# EAGLE board MagController (EAGLE 7.1.0)
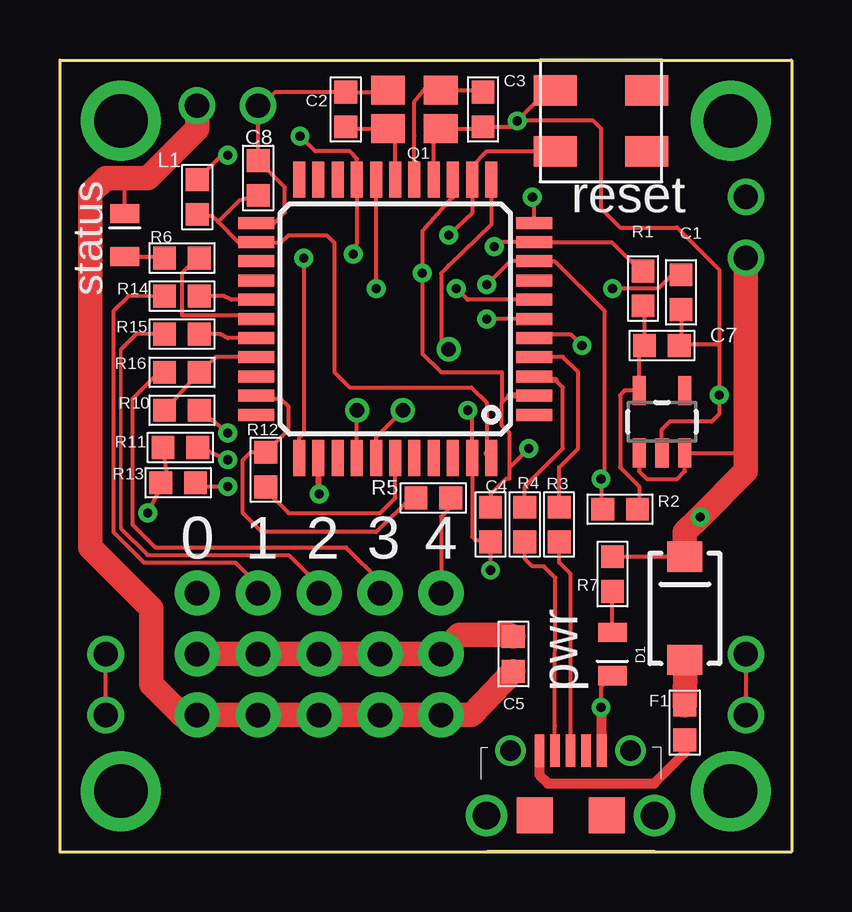
[diagram p0: board, top side]
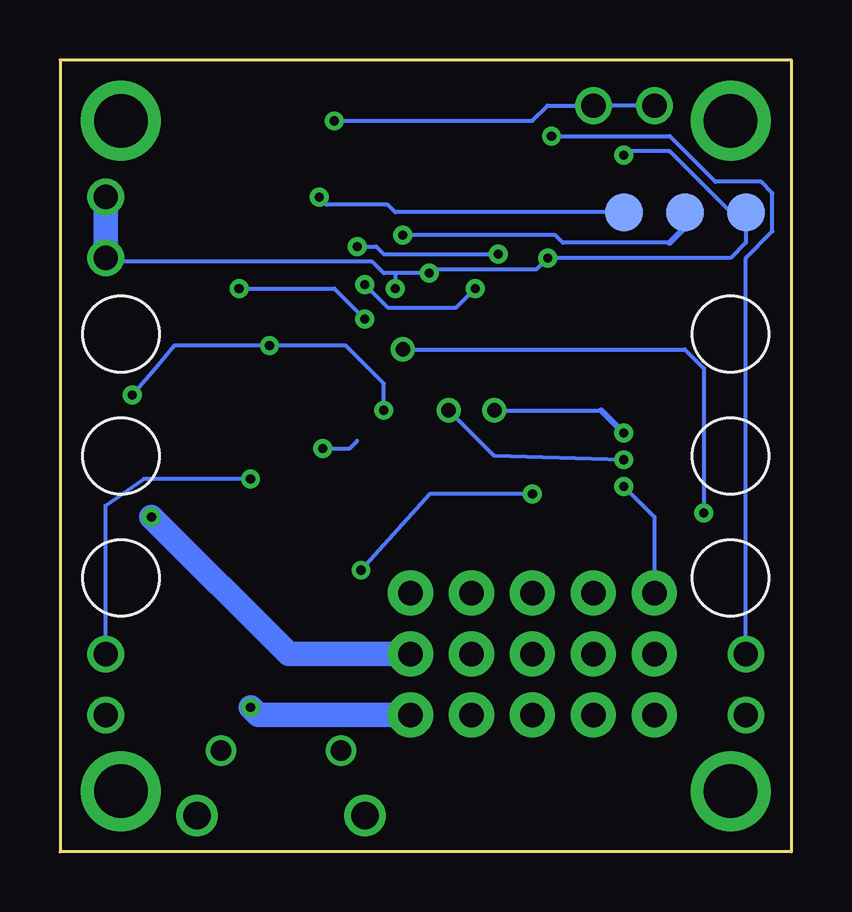
[diagram p1: board, bottom side, seen from below]

Size 30.48 x 33.02 mm. Coordinates in mm from the lower left corner, seen from the top.
Copper layers (1*16): Top 0.0178mm / dielectric 59mil / Bottom 0.0178mm
Design rules "SSC-EAGLE-2Lyr_v1.0.0.3": minimum track width 6mil, minimum drill 14mil, track to track 6mil, track to pad 6mil, pad to pad 6mil, via to via 6mil, smd to smd 6mil, copper to edge 20mil, drill to drill 16mil, minimum pad ring 8mil, minimum via ring 8mil, stop-mask expansion 3mil, vias tented up to drill 0mil, thermal gap 10mil

## Footprints (pad centres in the part's own frame; a part is rotated, then mirrored left to right if it is on the bottom)
0603 = smd 0.95 x 0.95: 1 -0.725,0; 2 0.725,0
SMA-DIODE = smd 1.27 x 1.47: A -2.15,0; C 2.15,0
1X05_NO_SILK = drill 1.016 pad 1.88: 1 0,0; 2 2.54,0; 3 5.08,0; 4 7.62,0; 5 10.16,0
0805-LED = smd 1.2 x 0.8: A 0,-0.9; C 0,0.9
MAGDEVICE = drill 1.016: GNDA 5.715,31.115; GNDB 8.255,31.115; SCLA 28.575,5.715; SCLB 28.575,8.255; SDAA 1.905,5.715; SDAB 1.905,8.255; VCCA 28.575,27.305; VCCB 28.575,24.765 | drill 2.223: H1 2.54,30.48; H2 2.54,2.54; H3 27.94,30.48; H4 27.94,2.54 | smd 1.587 x 1.587 bottom: MISO 6.985,26.67; RESET 4.445,26.67; VPROG 1.905,26.67
NX3225 = smd 1.4 x 1.2: 1 -1.1,-0.8; 2 1.1,-0.8; 3 1.1,0.8; 4 -1.1,0.8
BOURNS-7914J = smd 1.27 x 1.778: NEG$1 1.27,1.905; NEG$2 1.27,-1.905; POS$1 -1.27,1.905; POS$2 -1.27,-1.905
SPARKFUN-DIGITALIC_TQFP44 = smd 1.5 x 0.5: 1 -5.8,4; 2 -5.8,3.2; 3 -5.8,2.4; 4 -5.8,1.6; 5 -5.8,0.8; 6 -5.8,0; 7 -5.8,-0.8; 8 -5.8,-1.6; 9 -5.8,-2.4; 10 -5.8,-3.2; 11 -5.8,-4; 23 5.8,-4; 24 5.8,-3.2; 25 5.8,-2.4; 26 5.8,-1.6; 27 5.8,-0.8; 28 5.8,0; 29 5.8,0.8; 30 5.8,1.6; 31 5.8,2.4; 32 5.8,3.2; 33 5.8,4 | smd 0.5 x 1.5: 12 -4,-5.8; 13 -3.2,-5.8; 14 -2.4,-5.8; 15 -1.6,-5.8; 16 -0.8,-5.8; 17 0,-5.8; 18 0.8,-5.8; 19 1.6,-5.8; 20 2.4,-5.8; 21 3.2,-5.8; 22 4,-5.8; 34 4,5.8; 35 3.2,5.8; 36 2.4,5.8; 37 1.6,5.8; 38 0.8,5.8; 39 0,5.8; 40 -0.8,5.8; 41 -1.6,5.8; 42 -2.4,5.8; 43 -3.2,5.8; 44 -4,5.8
SOT23-5 = smd 0.55 x 1.2: 1 -0.95,-1.3; 2 0,-1.3; 3 0.95,-1.3; 4 0.95,1.3; 5 -0.95,1.3
USB-MICROB-FCI = smd 0.4 x 1.35: P1 -1.3,2.7; P2 -0.65,2.7; P3 0,2.7; P4 0.65,2.7; P5 1.3,2.7 | drill 0.85: S1 -2.5,2.7; S2 2.5,2.7 | drill 1.15: S3 -3.5,0; S6 3.5,0 | smd 1.5 x 1.5: S4 -1.5,0; S5 1.5,0

## Placement (x,y rotation side)
C1  1uF  [0603]  25.88,23.34 270 top
C2  18pF  [0603]  11.91,30.96 90 top
C3  18pF  [0603]  17.62,30.96 270 top
C4  100nF  [0603]  17.94,13.65 270 top
C5  10uF  [0603]  18.89,8.26 270 top
C7  100nF  [0603]  25.08,21.11 0 top
C8  100nF  [0603]  8.26,28.1 90 top
D1  [SMA-DIODE]  26.04,10.16 90 top
F1  2A  [0603]  26.04,5.4 90 top
JP4  [1X05_NO_SILK]  5.71,10.79 0 top
JP5  [1X05_NO_SILK]  15.88,5.71 180 top
JP6  [1X05_NO_SILK]  15.88,8.26 180 top
L1  10uH  [0603]  5.71,27.31 270 top
LED1  blue  [0805-LED]  2.7,25.72 0 top
LED2  green  [0805-LED]  23.02,8.26 180 top
PCB1  MAGDEVICE  [MAGDEVICE]  0,0 0 top
Q1  16Mhz  [NX3225]  14.76,30.96 0 top
R1  1.5KΩ  [0603]  24.29,23.5 90 top
R2  1.5KΩ  [0603]  23.34,14.29 180 top
R3  22Ω  [0603]  20.8,13.65 90 top
R4  22Ω  [0603]  19.37,13.65 90 top
R5  150Ω  [0603]  15.56,14.76 0 top
R6  681Ω  [0603]  5.08,24.77 180 top
R7  681Ω  [0603]  23.02,11.59 270 top
R10  1.5KΩ  [0603]  5.08,18.42 180 top
R11  1.5KΩ  [0603]  5.02,16.86 180 top
R12  1.5KΩ  [0603]  8.57,15.94 90 top
R13  150Ω  [0603]  4.92,15.4 0 top
R14  150Ω  [0603]  5.08,23.18 180 top
R15  150Ω  [0603]  5.08,21.59 180 top
R16  150Ω  [0603]  5.08,20 180 top
SW1  blue  [BOURNS-7914J]  22.54,30.48 90 top
U1  ATMEGA32U4TQFP  [SPARKFUN-DIGITALIC_TQFP44]  13.97,22.23 180 top
U2  3.3V/150mA  [SOT23-5]  25.08,17.94 0 top
U3  USBFCI-MICROB  [USB-MICROB-FCI]  21.27,1.52 0 top

## Library data of the parts
C1 = Modulo; PARTNUM: C0603C105K4RACTU
C2 C3 = Modulo; PARTNUM: C0603C180J5GACTU
C4 C7 C8 = Modulo; PARTNUM: C0603C104K5RACTU
C5 = Modulo; PARTNUM: GRM188R60J106ME47D
D1 = SparkFun-DiscreteSemi; PARTNUM: SSA33L-E3/61TGICT-ND
F1 = Modulo; PARTNUM: MF-PSMF110X-2
JP4-JP6 = SparkFun-Connectors
L1 = Modulo; PARTNUM: LQM18FN100M00
LED1 = Modulo; PARTNUM: LTST-C171TBKT
LED2 = Modulo; PARTNUM: LTST-C171GKT
PCB1 = Modulo
Q1 = Modulo; PARTNUM: CX3225GB16000P0HPQCC
R1 R2 R10-R12 = Modulo; PARTNUM: ERJ-3EKF1501V
R3 R4 = Modulo; PARTNUM: ERJ-3EKF22R0V
R5 R13-R16 = Modulo; PARTNUM: ERJ-3EKF1500V
R6 R7 = Modulo; PARTNUM: ERJ-3EKF6810V
SW1 = Modulo; PARTNUM: 7914J-1-000E
U1 = SparkFun-DigitalIC; PARTNUM: ATMEGA32U4-AU; PROD_ID: IC-11161
U2 = SparkFun-PowerIC; PARTNUM: MIC5205-3.3YM5 TR; PROD_ID: VREG-00822
U3 = IntegerLabs; PARTNUM: 10118194-0001LF

## Nets
+3.3V: C7.1 R1.1 R2.1 U2.5
AVCC: C8.1 L1.2 U1.24 U1.44
D0: R5.1 R12.2 U1.32
D2: R10.2 R16.1 U1.30
D3: R15.1 U1.29
D4: R14.1 U1.27
D5: R11.2 R13.1 U1.12
D+: R3.1 U3.P3
D-: R4.1 U3.P2
GND: C1.2 C2.2 C3.2 C4.2 C5.2 C7.2 C8.2 JP5.1 JP5.2 JP5.3 JP5.4 JP5.5 LED1.C LED2.C PCB1.GNDA PCB1.GNDB Q1.2 Q1.4 SW1.NEG$1 SW1.NEG$2 U1.5 U1.15 U1.23 U1.35 U1.43 U2.2 U3.P5
LED: R6.1 U1.28
MISO: PCB1.MISO U1.11
N$1: C1.1 U1.6
N$2: JP4.1 R13.2
N$3: F1.1 U3.P1
N$4: C3.1 Q1.3 U1.16
N$5: LED1.A R6.2
N$6: R12.1 U1.39
N$7: R11.1 U1.38
N$8: R3.2 U1.4
N$9: R4.2 U1.3
N$10: R10.1 U1.37
N$11: JP4.5 R5.2
N$12: LED2.A R7.2
N$13: JP4.2 R14.2
N$15: C2.1 Q1.1 U1.17
N$17: JP4.3 R15.2
N$18: JP4.4 R16.2
RESET: PCB1.RESET SW1.POS$1 SW1.POS$2 U1.13
SCL: PCB1.SCLA PCB1.SCLB R2.2 U1.9 U1.18
SDA: PCB1.SDAA PCB1.SDAB R1.2 U1.10 U1.19
VBUS: D1.A F1.2
VCC: C4.1 C5.1 D1.C JP6.1 JP6.2 JP6.3 JP6.4 JP6.5 L1.1 PCB1.VCCA PCB1.VCCB PCB1.VPROG R7.1 U1.2 U1.7 U1.14 U1.34 U2.1 U2.3

## Tracks (layer width: path | path; a pad name or v marks a point on that pad's centre or on a via)
+3.3V
  Top 0.159: R1.1 24.36,22.7 C7.1 24.13,20.89 U2.5 23.52,19.24 23.34,19.05 23.34,16.03 24.13,15.24 24.13,14.36 R2.1
AVCC
  Top 0.159: 17.78,16.62 17.78,18.73 17.14,19.37 12.06,19.37 11.43,20 11.43,25.4 11.11,25.72 9.53,25.72 9.21,25.4 U1.24 7.44,25.43 6.59,26.27 | 6.59,26.27 6.35,26.51 5.78,26.51 L1.2 | C8.1 7.46,27.15 6.59,26.27
  Top 0.254: 17.78,16.62 U1.44
D0
  Top 0.159: U1.32 8.3,18.89 9.21,18.89 9.53,18.57 9.53,17.62 R12.2 7.94,16.67 7.62,16.35 7.62,14.13 8.41,13.33 13.18,13.33 14.61,14.76 R5.1
D2
  Top 0.159: U1.30 7.62,20.64 6.51,20.64 R16.1 R10.2
D3
  Top 0.159: U1.29 6.99,21.43 6.67,21.59 R15.1
D4
  Top 0.159: U1.27 7.14,23.03 6.83,23.18 R14.1
D5  (via drill 0.38, 0.6)
  Top 0.159: 4.45,15.71 4.45,15.14 | U1.12 17.97,26.16 16.19,24.45 15.88,24.13 15.88,21.27 v16.19,20.96 | R11.2 4.45,15.71 | 4.45,15.71 v3.65,14.13
  Top 0.254: 4.45,15.14 R13.1
  Bottom 0.159: v16.19,20.96 4.45,20.96 3.65,20.16 v3.65,14.13
D+
  Top 0.159: U3.P3 21.27,11.59 20.8,12.06 R3.1
D-
  Top 0.159: U3.P2 20.62,5.25 20.64,11.43 20.16,11.91 19.68,11.91 19.37,12.22 R4.1
GND  (via drill 0.38)
  Top 0.159: U1.15 15.57,30.02 15.71,30.15 Q1.2 | Q1.2 17.62,30.16 C3.2 18.8,30.23 v19.05,30.48 | 8.17,31.03 PCB1.GNDB | PCB1.GNDB 8.98,31.68 C2.2 13.43,31.68 Q1.4 | v21.75,21.11 21.27,21.59 19.93,21.59 U1.5 | PCB1.GNDB C8.2 9.37,27.71 9.37,26.67 8.92,26.23 U1.23 | SW1.NEG$1 20.32,31.75 v19.05,30.48 | v19.05,30.48 22.22,30.48 22.54,30.16 22.54,26.83 23.34,26.04 25.72,26.04 27.46,24.29 27.46,21.11 | v22.54,6.03 22.54,6.88 LED2.C | LED1.C 2.7,27.94 2.54,28.1 | v16.99,18.42 17.17,18.23 U1.43 17.17,13.15 17.3,13.02 17.85,13.02 C4.2 v17.94,11.75 | C1.2 25.88,21.18 | 25.88,21.18 C7.2 | U2.2 25.08,17.62 25.4,17.94 27.15,17.94 27.46,18.26 v27.46,19.05 27.46,21.11 | 25.88,21.18 27.39,21.18 27.46,21.11 | Q1.2
  Top 0.254: U1.35 10.77,14.95 v10.79,14.92
  Top 0.406: U3.P5 22.57,6 v22.54,6.03
  Top 1.016: PCB1.GNDA 5.71,30.16 3.65,28.1 2.54,28.1 1.91,28.1 1.27,27.46 1.27,12.7 3.81,10.16 3.81,6.98 5.08,5.71 JP5.5 JP5.4 JP5.3 JP5.2 JP5.1 17.14,5.71 17.17,5.74 C5.2
  Bottom 0.159: PCB1.GNDA PCB1.GNDB 10.16,31.12 10.79,30.48 v19.05,30.48 | v10.79,14.92 15.08,14.92 v17.94,11.75 | v16.99,18.42 16.99,19.53 18.57,21.11 v21.75,21.11 25.72,21.11 26.51,20.16 v27.46,19.05
  Bottom 1.016: JP5.1 22.22,5.71 v22.54,6.03
LED
  Top 0.159: R6.1 5.71,24.77 5.08,24.13 5.08,22.38 8.01,22.38 U1.28
MISO  (via drill 0.38)
  Top 0.159: U1.11 19.77,27.22 v19.68,27.31
  Bottom 0.159: PCB1.MISO 16.51,26.67 16.83,26.99 19.37,26.99 v19.68,27.31
N$1  (via drill 0.38)
  Top 0.159: C1.1 25.49,24.06 24.92,23.5 v23.02,23.5 | U1.6 v17.78,22.23
  Bottom 0.159: v23.02,23.5 19.05,23.5 v17.78,22.23
N$2  (via drill 0.38)
  Top 0.159: R13.2 5.87,15.24 v6.99,15.24
  Bottom 0.159: v6.99,15.24 5.71,13.97 JP4.1
N$3
  Top 0.406: U3.P1 19.97,3.21 20.32,2.86 24.76,2.86 26.04,4.13 F1.1
N$4
  Top 0.159: U1.16 14.77,29.36 14.76,29.85 14.76,31.27 15.4,32.07 | Q1.3 17.62,31.75 17.46,31.92 17.39,31.92
  Top 0.254: 15.4,32.07 15.55,32.07 Q1.3 | 17.39,31.92 C3.1
N$5
  Top 0.159: LED1.A 4.3,24.82 R6.2
N$6
  Top 0.159: R12.1 8.57,15.08 9.53,14.13 13.34,14.13 13.97,14.76 U1.39
N$7  (via drill 0.38, 0.6)
  Top 0.159: U1.38 13.17,17.3 v14.29,18.42 | R11.1 5.84,16.86 v6.99,16.35
  Bottom 0.159: v6.99,16.35 12.38,16.51 v14.29,18.42
N$8
  Top 0.159: R3.2 20.8,16.03 21.59,16.83 21.59,20 20.95,20.64 19.78,20.64
  Top 0.254: 19.78,20.64 U1.4
N$9
  Top 0.159: R4.2 19.37,15.24 20.95,16.83 20.95,19.37 20.64,19.69
  Top 0.254: 20.64,19.69 19.91,19.69 U1.3
N$10  (via drill 0.38, 0.6)
  Top 0.159: U1.37 12.37,18.4 | R10.1 5.94,18.35 v6.99,17.46
  Top 0.254: 12.37,18.4 v12.38,18.42
  Bottom 0.159: v12.38,18.42 7.94,18.42
  Bottom 0.254: 7.94,18.42 v6.99,17.46
N$11
  Top 0.159: R5.2 16.28,14.38 15.88,13.97 JP4.5
N$12
  Top 0.159: LED2.A R7.2
N$13
  Top 0.152: R14.2 2.86,23.18
  Top 0.159: 2.86,23.18 2.22,22.54 2.22,13.33 3.49,12.06 7.3,12.06 8.26,11.11
  Top 0.254: 8.26,11.11 JP4.2
N$15
  Top 0.159: U1.17 13.97,29.85 Q1.1 | C2.1 11.5,30.16 13.18,30.16 13.43,30.39
  Top 0.254: 13.43,30.39 Q1.1
N$17
  Top 0.152: 2.54,20.96 2.54,13.49
  Top 0.159: R15.2 3.17,21.59 2.54,20.96 | 2.54,13.49 3.65,12.38 9.53,12.38 10.79,11.11
  Top 0.254: 10.79,11.11 JP4.3
N$18
  Top 0.159: R16.2 3.97,19.84 3.02,18.89 3.02,13.65 3.97,12.7 11.91,12.7 13.34,11.27
  Top 0.254: 13.34,11.27 JP4.4
RESET  (via drill 0.38)
  Top 0.159: v16.19,25.72 17.17,26.65 U1.13 17.17,28.6 17.78,29.21 SW1.POS$1
  Bottom 0.159: 5.08,25.4 9.53,25.4 9.84,25.72 v16.19,25.72
  Bottom 0.254: PCB1.RESET 4.45,26.04 5.08,25.4
SCL  (via drill 0.38)
  Top 0.159: PCB1.SCLB PCB1.SCLA | v17.78,23.65 18.75,24.62 U1.9 19.79,24.61 20.64,24.61 22.7,22.54 22.7,15.72 v22.54,15.56 22.54,14.36 R2.2 | v13.18,23.5 U1.18
  Bottom 0.159: PCB1.SCLB 28.57,14.45 26.99,15.56 v22.54,15.56 | v17.78,23.65 16.83,22.7 13.97,22.7 v13.18,23.5
SDA  (via drill 0.38)
  Top 0.159: PCB1.SDAA PCB1.SDAB | v10,29.85 10.64,29.21 12.06,29.21 12.37,28.91 U1.19 12.37,25.39 v12.22,24.92 | v18.1,25.24 18.28,25.43 U1.10 19.79,25.4 23.02,25.4 24.2,24.22 R1.2
  Bottom 0.159: PCB1.SDAB 1.91,24.77 0.79,25.88 0.79,27.46 1.27,27.94 3.17,27.94 5.08,29.85 v10,29.85 | v18.1,25.24 17.3,25.24 16.99,24.92 v12.22,24.92
VBUS
  Top 1.016: F1.2 26.05,7.87 D1.A
VCC  (via drill 0.38)
  Top 0.159: 18.73,16.03 18.73,17.46 18.41,17.78 18.41,18.73 | 18.41,18.73 18.41,20 15.88,20 15.1,20.78 v15.1,24.13 15.1,25.9 16.35,27.31 | 18.41,18.73 18.73,19.05 | U1.34 9.97,17.27 10.16,17.46 v10.16,24.77 | 18.73,16.03 18.73,15.56 18.57,15.56 17.94,14.92 C4.1 | 18.73,16.03 v19.53,16.83 | v6.99,29.05 6.83,29.14 L1.1 | R7.1 D1.C | U2.1 24.13,15.87 24.45,15.56 25.72,15.56 26.04,15.88 U2.3 28.52,16.64 28.52,16.77 28.57,16.83 | U1.7 16.98,23.03 v16.51,23.5
  Top 0.254: 18.73,19.05 19.74,19.05 U1.2 | U1.14 16.35,28.26 16.35,27.31
  Top 1.016: JP6.5 JP6.4 JP6.3 JP6.2 JP6.1 16.64,9.05 18.73,9.05 C5.1 | D1.C 26.04,13.33 v26.67,13.97 28.57,15.88 28.57,16.83 PCB1.VCCB
  Bottom 0.159: v19.53,16.83 18.41,16.83 18.1,17.15 | v6.99,29.05 6.83,29.21 5.08,29.21 2.54,26.67 PCB1.VPROG 1.91,25.4 2.54,24.77 v10.16,24.77 10.64,24.29 14.94,24.29 v15.1,24.13 16.51,24.13 | 16.51,24.13 16.99,24.13 17.46,24.61 28.42,24.61 PCB1.VCCB | 16.51,24.13 v16.51,23.5
  Bottom 1.016: PCB1.VCCB PCB1.VCCA | JP6.1 20.95,8.26 v26.67,13.97

## Text on the board
tPlace: reset | status | 0 | 1 | 2 | 3 | 4 | pwr